# Altium PCB VanAtta_Switch_TB.PcbDoc (part 1 of 2)
Units mil, origin at the board's own origin, x right, y up, seen from the top; angles counter-clockwise.
Board outline 5090 x 7845 mil, 4 copper layers (Top Layer, Int (GND), Int (PWR), Bottom Layer), stack 53.912 mil thick; 128 components, 107 nets, 607 pads, 288 vias.
Unrouted connection lines stored in the file: 160.
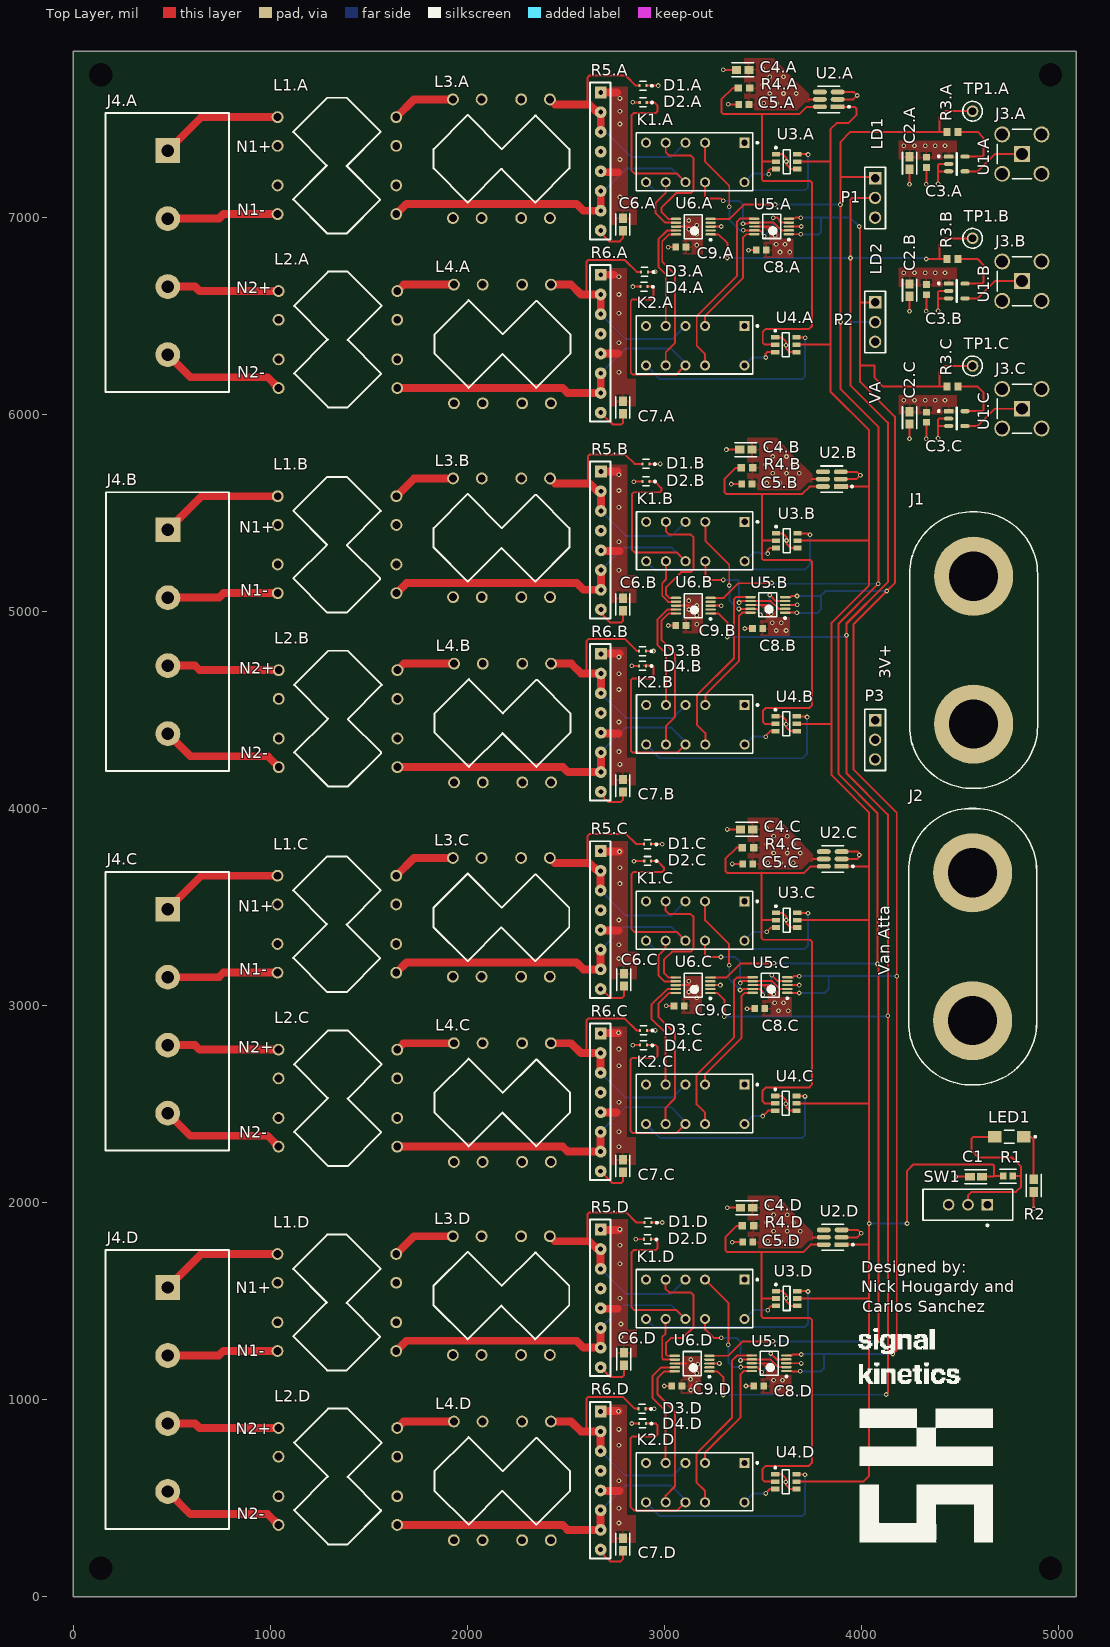
[diagram p0: Top Layer view]
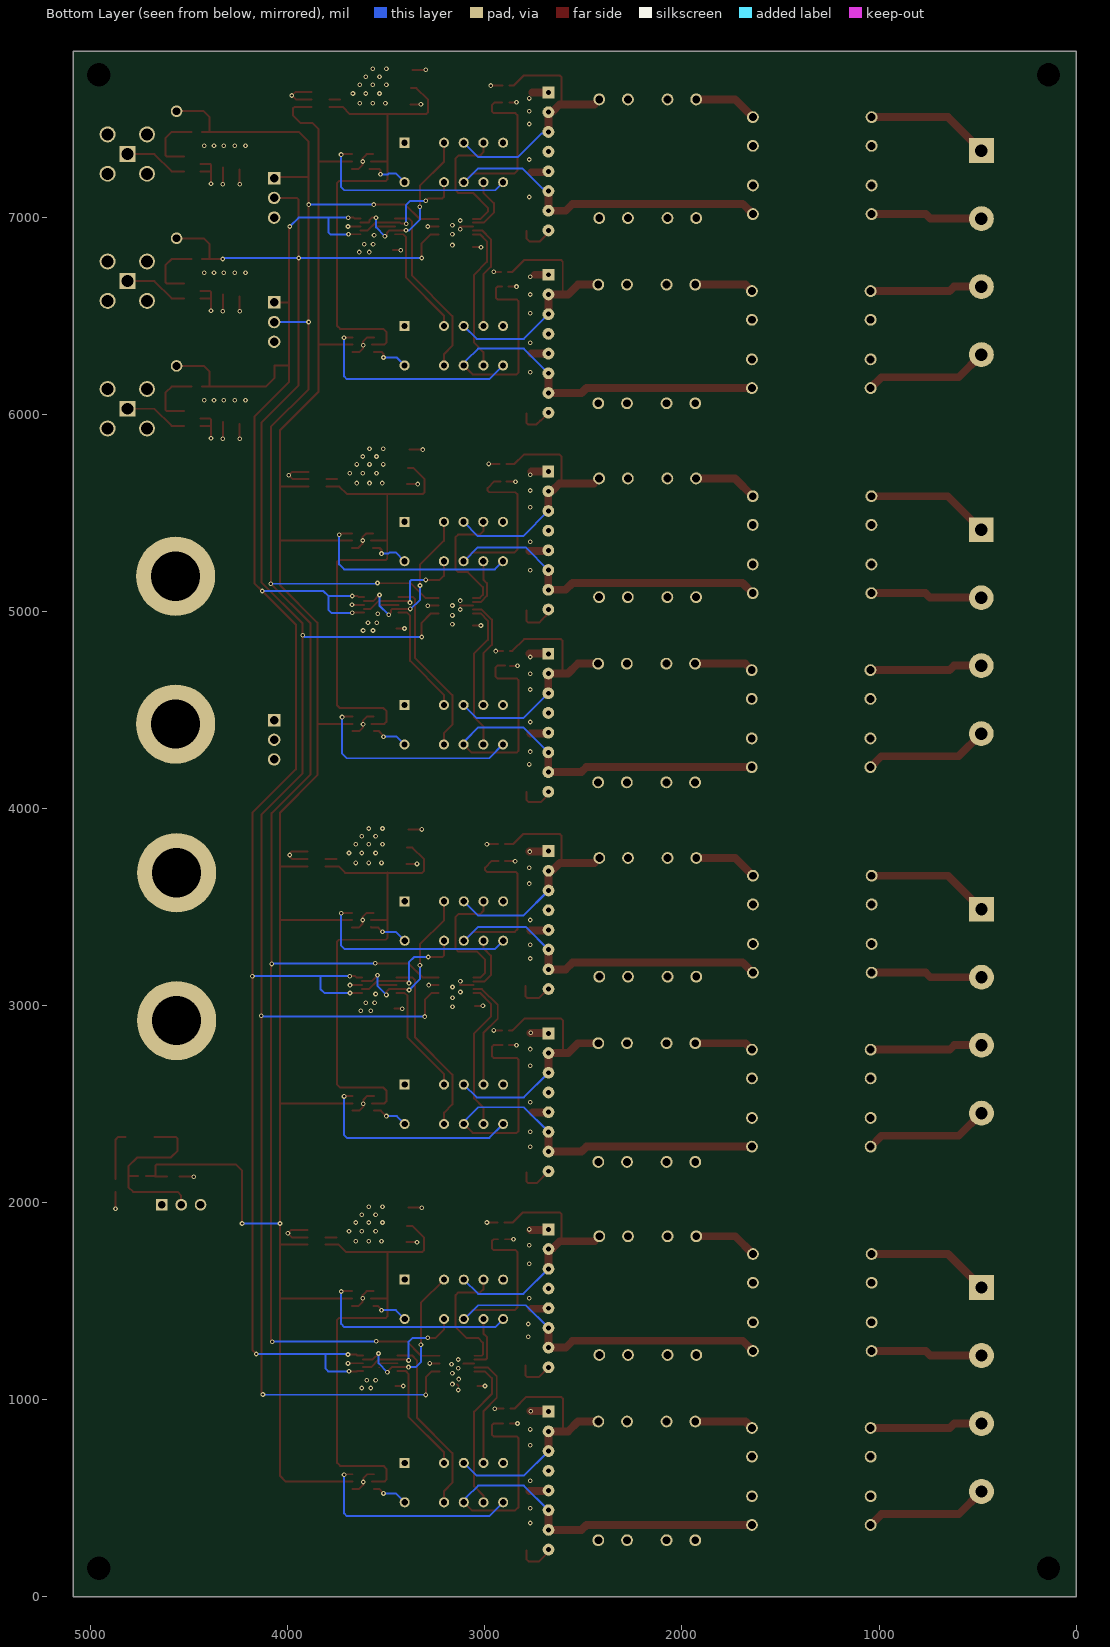
[diagram p1: Bottom Layer view, seen from below]
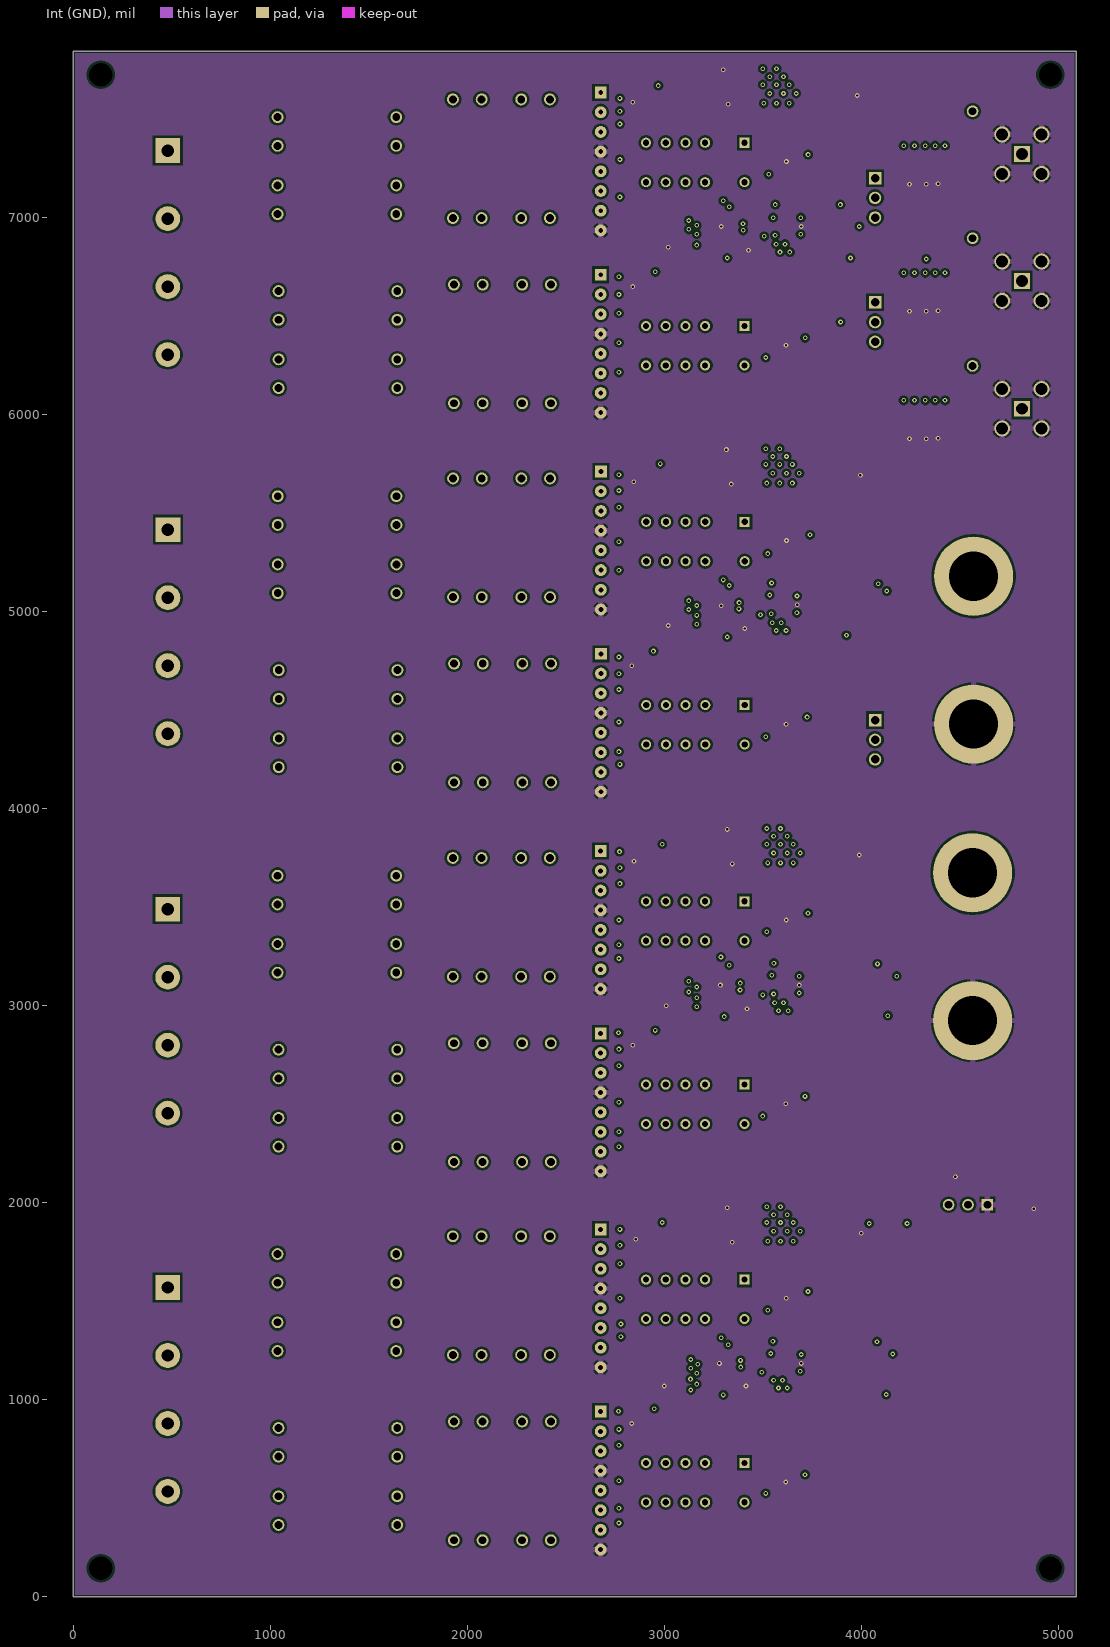
[diagram p2: Int (GND)]
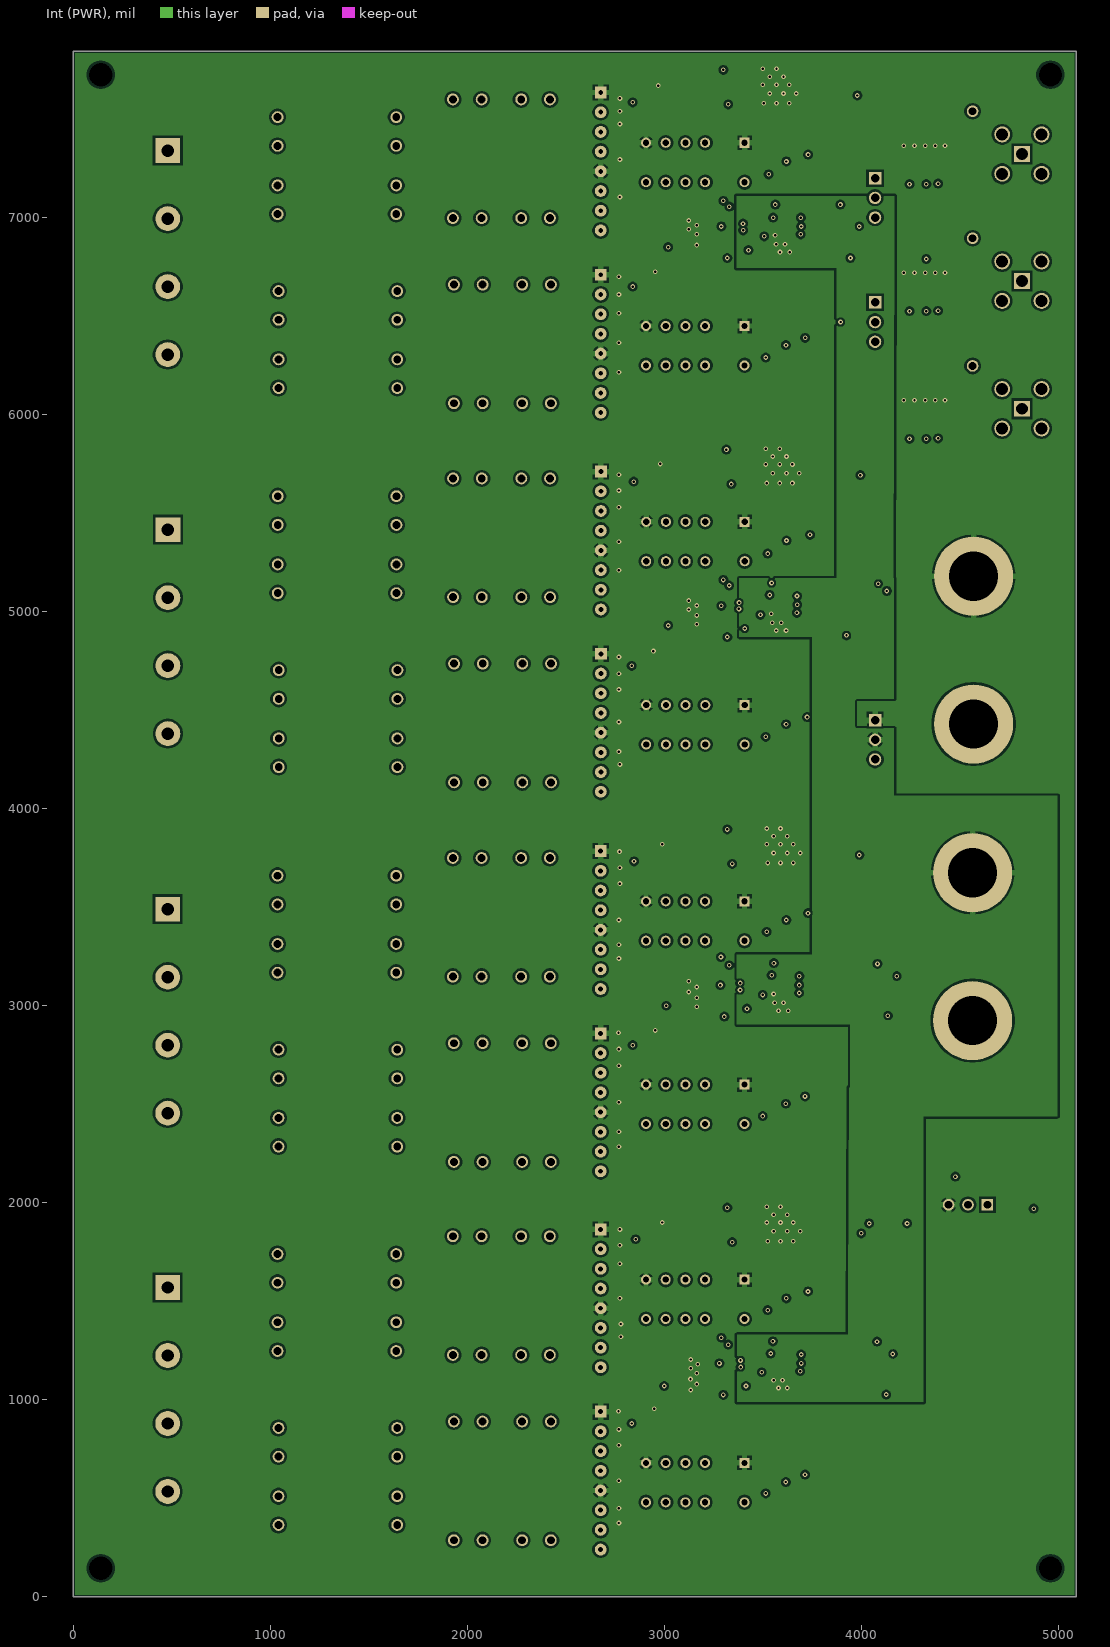
[diagram p3: Int (PWR)]
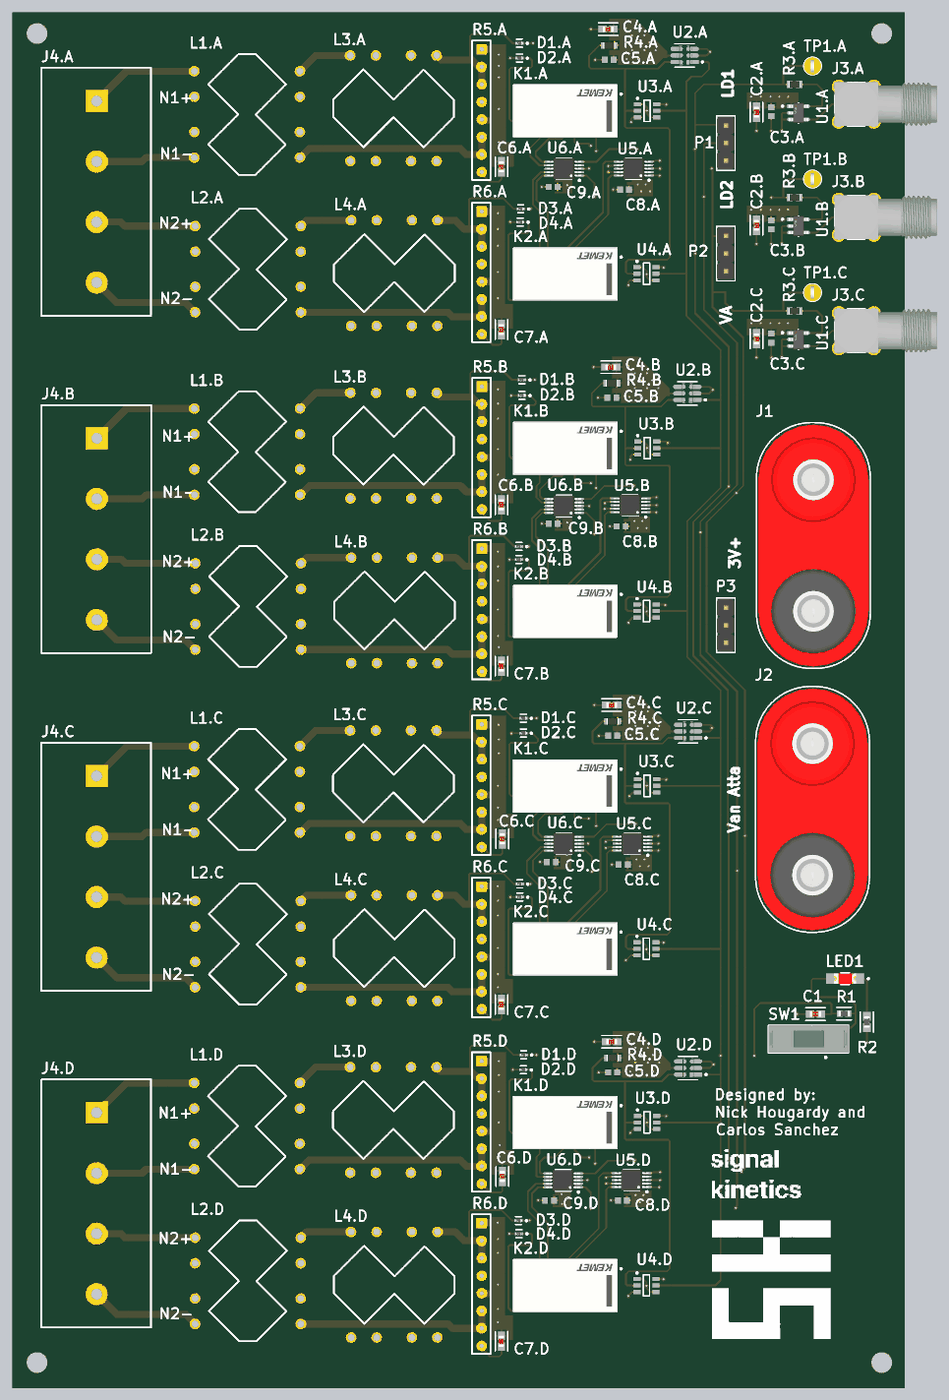
[diagram p5: 3D render of the assembled board from above, using the file's embedded part models]

## Layer stack, top to bottom
Top Solder: solder mask 1, SM-001, Dk 4
Top Layer: signal copper 1.378
Dielectric 1: prepreg 5.1, PP-017, Dk 4.3
Dielectric 2: prepreg 5.1, PP-017, Dk 4.3
Int (GND): signal copper 1.378
Dielectric 3: core 28, Core-039, Dk 4.8
Int (PWR): signal copper 1.378
Dielectric 4: prepreg 5.1, PP-017, Dk 4.3
Dielectric 5: prepreg 5.1, PP-017, Dk 4.3
Bottom Layer: signal copper 1.378
Bottom Solder: solder mask 1, SM-001, Dk 4

## Board outline
0,0 0,7845 5090,7845 5090,0

## Design rules (kind name [scope] priority, off if disabled: settings)
AcuteAngle [All] p1: minimum=6.00000000000000E+0001 checktracksonly=TRUE
AssemblyTestPointUsage [(not InNetClass('NOTESTPOINTS'))] p1: allowmultiple=TRUE
AssemblyTestPointUsage AssemblyTestPointUsageN [InNetClass('NOTESTPOINTS')] p2: valid=2 allowmultiple=TRUE
AssemblyTestpoint [All] p1: testpointundercomponent=TRUE minsize=31.5 maxsize=78.74 preferedsize=39.37 minholesize=0 maxholesize=13.78 preferedholesize=0 testpointgrid=50 usegrid=FALSE gridoriginx=3444.88 gridoriginy=2460.63 gridtolerance=0.01 allowsidetop=TRUE minspacing=100 // Zollner
BoardOutlineClearance BoardCopperOutlineClearance [All] p1: gap=10 ignorepadtopadclearanceinfootprint=FALSE
Clearance PadToViaClearance [IsVia and not IsComponentVia vs IsPad] p1: gap=9 ignorepadtopadclearanceinfootprint=FALSE
Clearance "Clearance (FAB)" [All] p2: gap=8 ignorepadtopadclearanceinfootprint=TRUE except(12: Arc-Poly Track-Poly SMDPad-Poly THPad-Poly Via-Poly Fill-Poly Poly-Poly)
ComponentClearance ComponentClearance_NetTie [((ObjectKind = 'Component') And (ComponentType = 'Net Tie')) Or (Footprint = 'StarPoint') Or (Footprint like 'NetTieVia*')] p1: gap=-150 collisioncheckmode=3 verticalgap=-150 showdistances=FALSE
ComponentClearance [All] p2: gap=10 collisioncheckmode=3 verticalgap=10 showdistances=FALSE
DiffPairsRouting [All] p1: maxlimit=50 minlimit=8 mostfreqgap=8 toplayer_minwidth=6 toplayer_maxwidth=100 toplayer_prefwidth=10 midlayer1_minwidth=6 midlayer1_maxwidth=100 midlayer1_prefwidth=10 midlayer2_minwidth=6 midlayer2_maxwidth=100 midlayer2_prefwidth=10 bottomlayer_minwidth=6 bottomlayer_maxwidth=100 bottomlayer_prefwidth=10 maxuncoupledlength=500
FabricationTestPointUsage [All] p1: valid=2 allowmultiple=FALSE
FabricationTestpoint [(IsVia)] p1: side=3 testpointundercomponent=TRUE minsize=40 maxsize=100 preferedsize=60 minholesize=0 maxholesize=40 preferedholesize=32 testpointgrid=1 allowsidetop=TRUE allowsidebottom=TRUE usegrid=FALSE gridtolerance=0.01
HoleSize [All] p1: absolutevalues=TRUE maxlimit=250 minlimit=11.81 maxpercent=80.000 minpercent=20.000 // Zollner
HoleToHoleClearance HoleToHoleClearance_NetTieVia [InPadClass('NetTieVias') vs InPadClass('NetTieVias')] p1: gap=0 allowstackedmicrovias=TRUE
HoleToHoleClearance [All] p2: gap=9.84 allowstackedmicrovias=TRUE // Zollner
MinimumAnnularRing [All] p1: minimumring=5.91 // PCBWAY
MinimumSolderMaskSliver [All] p1: minsoldermaskwidth=3.5 // Zollner
PlaneClearance PlaneClearance_1 [All] p1: clearance=20
PlaneConnect [All] p1: pad.planeconnectstyle=Relief pad.reliefexpansion=20 pad.reliefentries=4 pad.reliefconductorwidth=10 pad.reliefairgap=10 via.planeconnectstyle=Direct via.reliefexpansion=20 via.reliefentries=4 via.reliefconductorwidth=10 via.reliefairgap=10
PolygonConnect [All] p1: thpad.connectstyle=Relief thpad.reliefconductorwidth=30 thpad.reliefentries=4 thpad.polygonreliefangle="90 Angle" thpad.airgapwidth=10 smdpad.connectstyle=Relief smdpad.reliefconductorwidth=10 smdpad.reliefentries=4 smdpad.polygonreliefangle="90 Angle" smdpad.airgapwidth=10 via.connectstyle=Direct via.reliefconductorwidth=10 via.reliefentries=4 via.polygonreliefangle="90 Angle" via.airgapwidth=10
RoomDefinition "Linear Array1" [InComponentClass('Linear Array1')] p1: confinementstyle=ConfineIn formatcopy=TRUE lockcomponents=FALSE outline 2990.63,6794.37 3350.63,6794.37 3350.63,7095 2990.63,7095
RoomDefinition "Signal Processing3" [InComponentClass('Signal Processing3')] p2: confinementstyle=ConfineIn formatcopy=TRUE lockcomponents=FALSE outline 3295,3650 4045,3650 4045,3955 3295,3955
RoomDefinition "Van Atta Array4" [InComponentClass('Van Atta Array4')] p3: confinementstyle=ConfineIn formatcopy=TRUE lockcomponents=FALSE outline 3792.4,1325.63 3376.6,1325.63 3376.6,1026.26 3792.4,1026.26
RoomDefinition "Van Atta Array3" [InComponentClass('Van Atta Array3')] p4: confinementstyle=ConfineIn formatcopy=TRUE lockcomponents=FALSE outline 3797.4,3245 3381.6,3245 3381.6,2945.63 3797.4,2945.63
RoomDefinition "Van Atta Array2" [InComponentClass('Van Atta Array2')] p5: confinementstyle=ConfineIn formatcopy=TRUE lockcomponents=FALSE outline 3785.8,5174.37 3370,5174.37 3370,4875 3785.8,4875
RoomDefinition "Input and Relays2" [InComponentClass('Input and Relays2')] p6: confinementstyle=ConfineIn formatcopy=TRUE lockcomponents=FALSE outline 63.39,3988.82 3804.06,3988.82 3804.06,4863.82 2965.75,4863.82 2965.75,5179.01 3804.06,5175.67 3804.06,5556.18 3265.54,5556.18 3265.75,5883.82 63.39,5883.82
RoomDefinition "Input and Relays1" [InComponentClass('Input and Relays1')] p7: confinementstyle=ConfineIn formatcopy=TRUE lockcomponents=FALSE outline 62.64,5912.64 3803.31,5912.64 3803.31,6787.64 2965,6787.64 2965,7102.83 3803.31,7099.49 3803.31,7480 3264.79,7480 3265,7807.64 62.64,7807.64
RoomDefinition "Van Atta Array1" [InComponentClass('Van Atta Array1')] p8: confinementstyle=ConfineIn formatcopy=TRUE lockcomponents=FALSE outline 3805,7095 3389.2,7095 3389.2,6795.63 3805,6795.63
RoomDefinition "Top sheet" [InComponentClass('Top sheet')] p9: confinementstyle=ConfineIn formatcopy=TRUE lockcomponents=FALSE outline 4180,1860 4970,1860 4970,5665 4180,5665
RoomDefinition "Linear Data 1" [InComponentClass('Linear Data 1')] p10: confinementstyle=ConfineIn formatcopy=TRUE lockcomponents=FALSE outline 4185,7070 5340,7070 5340,7690 4185,7690
RoomDefinition "Signal Processing1" [InComponentClass('Signal Processing1')] p11: confinementstyle=ConfineIn formatcopy=TRUE lockcomponents=FALSE outline 3275,7505 4025,7505 4025,7810 3275,7810
RoomDefinition "Signal Processing2" [InComponentClass('Signal Processing2')] p12: confinementstyle=ConfineIn formatcopy=TRUE lockcomponents=FALSE outline 3290.61,5577.6 4040.61,5577.6 4040.61,5882.6 3290.61,5882.6
RoomDefinition "Linear Array2" [InComponentClass('Linear Array2')] p13: confinementstyle=ConfineIn formatcopy=TRUE lockcomponents=FALSE outline 2990.63,4870.63 3350.63,4870.63 3350.63,5171.26 2990.63,5171.26
RoomDefinition "Linear Data 2" [InComponentClass('Linear Data 2')] p14: confinementstyle=ConfineIn formatcopy=TRUE lockcomponents=FALSE outline 4185,6425 5345,6425 5345,7045 4185,7045
RoomDefinition "Van Atta Data" [InComponentClass('Van Atta Data')] p15: confinementstyle=ConfineIn formatcopy=TRUE lockcomponents=FALSE outline 4185,5777.56 5350,5777.56 5350,6397.56 4185,6397.56
RoomDefinition "Linear Array3" [InComponentClass('Linear Array3')] p16: confinementstyle=ConfineIn formatcopy=TRUE lockcomponents=FALSE outline 2990,2944.37 3350,2944.37 3350,3245 2990,3245
RoomDefinition "Linear Array4" [InComponentClass('Linear Array4')] p17: confinementstyle=ConfineIn formatcopy=TRUE lockcomponents=FALSE outline 2985,1024.37 3345,1024.37 3345,1325 2985,1325
RoomDefinition "Input and Relays4" [InComponentClass('Input and Relays4')] p18: confinementstyle=ConfineIn formatcopy=TRUE lockcomponents=FALSE outline 62.36,142.64 3803.03,142.64 3803.03,1017.64 2964.72,1017.64 2964.72,1332.83 3803.03,1329.49 3803.03,1710 3264.51,1710 3264.72,2037.64 62.36,2037.64
RoomDefinition "Signal Processing4" [InComponentClass('Signal Processing4')] p19: confinementstyle=ConfineIn formatcopy=TRUE lockcomponents=FALSE outline 3295,1730 4045,1730 4045,2035 3295,2035
RoomDefinition "Input and Relays3" [InComponentClass('Input and Relays3')] p20: confinementstyle=ConfineIn formatcopy=TRUE lockcomponents=FALSE outline 62.36,2062.64 3803.03,2062.64 3803.03,2937.64 2964.72,2937.64 2964.72,3252.83 3803.03,3249.49 3803.03,3630 3264.51,3630 3264.72,3957.64 62.36,3957.64
RoutingVias [All] p1: holewidth=12 width=24 viastyle="Through Hole" minholewidth=12 minwidth=24 maxholewidth=12 maxwidth=24
SMDEntry [not IsTestpoint] p1: side=TRUE corner=TRUE anyangle=FALSE
SMDNeckDown [not IsTestpoint] p1: percent=90.000
SMDToCorner [All] p1: distance=10000
SMDToPlane [All] p1: distance=0
ShortCircuit [All vs not IsBoardCutoutRegion] p1: allowed=FALSE
SilkToSolderMaskClearance [IsPad] p1: minsilkscreentomaskgap=5 clearancetoexposedcopper=TRUE
SolderMaskExpansion [All] p1: expansion=1.97 istentingtop=FALSE // Zollner
SolderMaskExpansion SolderMaskExpansionToHoles [All] p2: expansion=3.94 istentingtop=FALSE soldermaskfromhole=TRUE // Zollner
UnRoutedNet [All] p1: checkbadconnections=TRUE
Width [All] p1: maxlimit=500 minlimit=4 preferedwidth=10
16 further rules are at their usual default settings.

## Classes and differential pairs
channel class USRP: "Linear Data 1" "Linear Data 2" "Van Atta Data"
channel class "Van Atta array": "Van Atta Array1" "Van Atta Array2" "Van Atta Array3" "Van Atta Array4"
channel class V2LinearArray: "Linear Array1" "Linear Array2" "Linear Array3" "Linear Array4"
channel class Switch: "Switch 1" "Switch 2" "Switch 3" "Switch 4"
channel class "Signal Processing": "Signal Processing1" "Signal Processing2" "Signal Processing3" "Signal Processing4"
channel class "Inputs and Relays": "Input and Relays1" "Input and Relays2" "Input and Relays3" "Input and Relays4"
component class "Van Atta Array3": C8.C U5.C
component class "Van Atta Array2": C8.B U5.B
component class "Van Atta Array1": C8.A U5.A
component class "Van Atta Array4": C8.D U5.D
component class "Top sheet": C1 J1 J2 LED1 P1 P2 P3 R1 R2 SW1
component class "Signal Processing3": C4.C C5.C "R1.Signal Processing4" R4.C U2.C
component class "Signal Processing2": C4.B C5.B "R1.Signal Processing3" R4.B U2.B
component class "Signal Processing1": C4.A C5.A "R1.Signal Processing2" R4.A U2.A
component class "Signal Processing4": C4.D C5.D "R1.Signal Processing1" R4.D U2.D
component class "Linear Array3": C9.C U6.C
component class "Linear Array2": C9.B U6.B
component class "Linear Array1": C9.A U6.A
component class "Linear Array4": C9.D U6.D
component class "Input and Relays3": C6.C C7.C D1.C D2.C D3.C D4.C J4.C K1.C K2.C L1.C L2.C L3.C L4.C R5.C R6.C U3.C U4.C
component class "Input and Relays2": C6.B C7.B D1.B D2.B D3.B D4.B J4.B K1.B K2.B L1.B L2.B L3.B L4.B R5.B R6.B U3.B U4.B
component class "Input and Relays1": C6.A C7.A D1.A D2.A D3.A D4.A J4.A K1.A K2.A L1.A L2.A L3.A L4.A R5.A R6.A U3.A U4.A
component class "Input and Relays4": C6.D C7.D D1.D D2.D D3.D D4.D J4.D K1.D K2.D L1.D L2.D L3.D L4.D R5.D R6.D U3.D U4.D

## Components (designator, comment, footprint, x,y, rotation, side; value= is the part's Value field where it differs from the comment)
C1 "UMK107BJ105KA-T" FP-0603-L_1_6_0_1-W_0_8_0-IPC_A 4581.9,2132.5 r180 top
C2.A "GRM188R60J106ME47D" FP-GRM188-0_1-e0_2_0_55-IPC_A 4245,7276.57 r270 top
C2.B "GRM188R60J106ME47D" FP-GRM188-0_1-e0_2_0_55-IPC_A 4245,6631.57 r270 top
C2.C "GRM188R60J106ME47D" FP-GRM188-0_1-e0_2_0_55-IPC_A 4245,5984.13 r270 top
C3.A "06035C104KAT4A" CAPC1608X90X35LL15T15 4330,7280 r90 top
C3.B "06035C104KAT4A" CAPC1608X90X35LL15T15 4330,6635 r90 top
C3.C "06035C104KAT4A" CAPC1608X90X35LL15T15 4330,5987.56 r90 top
C4.A "GRM188R60J106ME47D" FP-GRM188-0_1-e0_2_0_55-IPC_A 3398.43,7750 r180 top (schematic designator C4)
C4.B "GRM188R60J106ME47D" FP-GRM188-0_1-e0_2_0_55-IPC_A 3414.04,5822.6 r180 top (schematic designator C4)
C4.C "GRM188R60J106ME47D" FP-GRM188-0_1-e0_2_0_55-IPC_A 3418.43,3895 r180 top (schematic designator C4)
C4.D "GRM188R60J106ME47D" FP-GRM188-0_1-e0_2_0_55-IPC_A 3418.43,1975 r180 top (schematic designator C4)
C5.A "06035C104KAT4A" CAPC1608X90X35LL15T15 3404.41,7575 r0 top (schematic designator C5)
C5.B "06035C104KAT4A" CAPC1608X90X35LL15T15 3420.02,5647.6 r0 top (schematic designator C5)
C5.C "06035C104KAT4A" CAPC1608X90X35LL15T15 3424.41,3720 r0 top (schematic designator C5)
C5.D "06035C104KAT4A" CAPC1608X90X35LL15T15 3424.41,1800 r0 top (schematic designator C5)
C6.A "GRM188R60J106ME47D" FP-GRM188-0_1-e0_2_0_55-IPC_A 2790,6965 r270 top (schematic designator C6)
C6.B "GRM188R60J106ME47D" FP-GRM188-0_1-e0_2_0_55-IPC_A 2790,5036.57 r270 top (schematic designator C6)
C6.C "GRM188R60J106ME47D" FP-GRM188-0_1-e0_2_0_55-IPC_A 2795,3131.57 r270 top (schematic designator C6)
C6.D "GRM188R60J106ME47D" FP-GRM188-0_1-e0_2_0_55-IPC_A 2795,1206.57 r270 top (schematic designator C6)
C7.A "GRM188R60J106ME47D" FP-GRM188-0_1-e0_2_0_55-IPC_A 2790,6036.57 r270 top (schematic designator C7)
C7.B "GRM188R60J106ME47D" FP-GRM188-0_1-e0_2_0_55-IPC_A 2790,4116.57 r270 top (schematic designator C7)
C7.C "GRM188R60J106ME47D" FP-GRM188-0_1-e0_2_0_55-IPC_A 2790,2186.57 r270 top (schematic designator C7)
C7.D "GRM188R60J106ME47D" FP-GRM188-0_1-e0_2_0_55-IPC_A 2790,266.57 r270 top (schematic designator C7)
C8.A "06035C104KAT4A" CAPC1608X90X35LL15T15 3492.6,6835 r180 top (schematic designator C8)
C8.B "06035C104KAT4A" CAPC1608X90X35LL15T15 3473.4,4914.37 r180 top (schematic designator C8)
C8.C "06035C104KAT4A" CAPC1608X90X35LL15T15 3485,2985 r180 top (schematic designator C8)
C8.D "06035C104KAT4A" CAPC1608X90X35LL15T15 3480,1070 r180 top (schematic designator C8)
C9.A "06035C104KAT4A" CAPC1608X90X35LL15T15 3085,6850 r180 top (schematic designator C9)
C9.B "06035C104KAT4A" CAPC1608X90X35LL15T15 3085,4930 r180 top (schematic designator C9)
C9.C "06035C104KAT4A" CAPC1608X90X35LL15T15 3075,3000 r180 top (schematic designator C9)
C9.D "06035C104KAT4A" CAPC1608X90X35LL15T15 3064.37,1070 r180 top (schematic designator C9)
D1.A "NSR0140P2T5G" FP-514AB-01-MFG 2892.28,7670 r180 top value=2pF (schematic designator D1)
D1.B "NSR0140P2T5G" FP-514AB-01-MFG 2907.28,5750 r180 top value=2pF (schematic designator D1)
D1.C "NSR0140P2T5G" FP-514AB-01-MFG 2915,3820 r180 top value=2pF (schematic designator D1)
D1.D "NSR0140P2T5G" FP-514AB-01-MFG 2917.28,1900 r180 top value=2pF (schematic designator D1)
D2.A "NSR0140P2T5G" FP-514AB-01-MFG 2892.72,7585 r180 top value=2pF (schematic designator D2)
D2.B "NSR0140P2T5G" FP-514AB-01-MFG 2907.71,5661.18 r180 top value=2pF (schematic designator D2)
D2.C "NSR0140P2T5G" FP-514AB-01-MFG 2915.55,3735 r180 top value=2pF (schematic designator D2)
D2.D "NSR0140P2T5G" FP-514AB-01-MFG 2915,1815 r180 top value=2pF (schematic designator D2)
D3.A "NSR0140P2T5G" FP-514AB-01-MFG 2900,6725 r180 top value=2pF (schematic designator D3)
D3.B "NSR0140P2T5G" FP-514AB-01-MFG 2890,4800 r180 top value=2pF (schematic designator D3)
D3.C "NSR0140P2T5G" FP-514AB-01-MFG 2895,2875 r180 top value=2pF (schematic designator D3)
D3.D "NSR0140P2T5G" FP-514AB-01-MFG 2887.28,955 r180 top value=2pF (schematic designator D3)
D4.A "NSR0140P2T5G" FP-514AB-01-MFG 2896.97,6650 r180 top value=2pF (schematic designator D4)
D4.B "NSR0140P2T5G" FP-514AB-01-MFG 2890,4725 r180 top value=2pF (schematic designator D4)
D4.C "NSR0140P2T5G" FP-514AB-01-MFG 2894.72,2800 r180 top value=2pF (schematic designator D4)
D4.D "NSR0140P2T5G" FP-514AB-01-MFG 2890,880 r180 top value=2pF (schematic designator D4)
J1 "2269-2" FP-2269-2-MFG 4570,4805 r270 top
J2 "2269-2" FP-2269-2-MFG 4565,3300 r270 top
J3.A "731000114" MOLX-731000114_V 4815,7322.44 r180 top
J3.B "731000114" MOLX-731000114_V 4815,6677.44 r180 top
J3.C "731000114" MOLX-731000114_V 4815,6030 r180 top
J4.A "NC6-P108-04" NC6-P108-04-Footprint-1 480.28,7340 r0 top (schematic designator J4)
J4.B "NC6-P108-04" NC6-P108-04-Footprint-1 481.02,5416.18 r0 top (schematic designator J4)
J4.C "NC6-P108-04" NC6-P108-04-Footprint-1 480,3490 r0 top (schematic designator J4)
J4.D "NC6-P108-04" NC6-P108-04-Footprint-1 480,1570 r0 top (schematic designator J4)
K1.A "EC2-3TNU" FP-EC2-3TNU-MFG 3153.7,7283.94 r180 top (schematic designator K1)
K1.B "EC2-3TNU" FP-EC2-3TNU-MFG 3154.45,5360.12 r180 top (schematic designator K1)
K1.C "EC2-3TNU" FP-EC2-3TNU-MFG 3153.43,3433.94 r180 top (schematic designator K1)
K1.D "EC2-3TNU" FP-EC2-3TNU-MFG 3153.43,1513.94 r180 top (schematic designator K1)
K2.A "EC2-3TNU" FP-EC2-3TNU-MFG 3153.7,6353.94 r180 top (schematic designator K2)
K2.B "EC2-3TNU" FP-EC2-3TNU-MFG 3154.45,4430.12 r180 top (schematic designator K2)
K2.C "EC2-3TNU" FP-EC2-3TNU-MFG 3153.43,2503.94 r180 top (schematic designator K2)
K2.D "EC2-3TNU" FP-EC2-3TNU-MFG 3153.43,583.94 r180 top (schematic designator K2)
L1.A "RM6 Inductor" "RM6 Inductor-Footprint-1" 1037.64,7510 r0 top (schematic designator L1)
L1.B "RM6 Inductor" "RM6 Inductor-Footprint-1" 1038.39,5586.18 r0 top (schematic designator L1)
L1.C "RM6 Inductor" "RM6 Inductor-Footprint-1" 1037.36,3660 r0 top (schematic designator L1)
L1.D "RM6 Inductor" "RM6 Inductor-Footprint-1" 1037.36,1740 r0 top (schematic designator L1)
L2.A "RM6 Inductor" "RM6 Inductor-Footprint-1" 1042.64,6627.13 r0 top (schematic designator L2)
L2.B "RM6 Inductor" "RM6 Inductor-Footprint-1" 1043.39,4703.31 r0 top (schematic designator L2)
L2.C "RM6 Inductor" "RM6 Inductor-Footprint-1" 1042.36,2777.13 r0 top (schematic designator L2)
L2.D "RM6 Inductor" "RM6 Inductor-Footprint-1" 1042.36,857.13 r0 top (schematic designator L2)
L3.A "RM6 Inductor" "RM6 Inductor-Footprint-1" 1927.64,6997.64 r90 top (schematic designator L3)
L3.B "RM6 Inductor" "RM6 Inductor-Footprint-1" 1928.39,5073.82 r90 top (schematic designator L3)
L3.C "RM6 Inductor" "RM6 Inductor-Footprint-1" 1927.36,3147.64 r90 top (schematic designator L3)
L3.D "RM6 Inductor" "RM6 Inductor-Footprint-1" 1927.36,1227.64 r90 top (schematic designator L3)
L4.A "RM6 Inductor" "RM6 Inductor-Footprint-1" 1932.64,6057.64 r90 top (schematic designator L4)
L4.B "RM6 Inductor" "RM6 Inductor-Footprint-1" 1933.39,4133.82 r90 top (schematic designator L4)
L4.C "RM6 Inductor" "RM6 Inductor-Footprint-1" 1932.36,2207.64 r90 top (schematic designator L4)
L4.D "RM6 Inductor" "RM6 Inductor-Footprint-1" 1932.36,287.64 r90 top (schematic designator L4)
LED1 "CMD15-21VRD/TR8" FP-CMD15-21-MFG 4751.18,2335 r180 top
P1 "61300311121" 61300311121 4070,7100 r270 top
P2 "61300311121" 61300311121 4070,6470 r270 top
P3 "61300311121" 61300311121 4070,4350 r270 top
R1 "ERA-3AEB102V" FP-ERA3A-IPC_C 4745,2135 r180 top
R2 "ERA-3AEB471V" FP-ERA3A-IPC_A 4875,2087.49 r270 top
R3.A "Resistor 22R +/-1% 0603 100 mW" RESC1609X50X30ML08T20 4462.44,7435 r180 top value=22
R3.B "Resistor 22R +/-1% 0603 100 mW" RESC1609X50X30ML08T20 4462.44,6790 r180 top value=22
R3.C "Resistor 22R +/-1% 0603 100 mW" RESC1609X50X30ML08T20 4462.44,6142.56 r180 top value=22
R4.A "ERJ-3EKF4701V" RESC1608X55X30NL15T15 3404.92,7657.74 r0 top (schematic designator R4)
R4.B "ERJ-3EKF4701V" RESC1608X55X30NL15T15 3420.54,5730.33 r0 top (schematic designator R4)
R4.C "ERJ-3EKF4701V" RESC1608X55X30NL15T15 3424.92,3802.74 r0 top (schematic designator R4)
R4.D "ERJ-3EKF4701V" RESC1608X55X30NL15T15 3424.92,1882.74 r0 top (schematic designator R4)
R5.A "4608X-102-205FLF" 4608X-102-205FLF-Footprint-1 2677.64,7635 r270 top (schematic designator R5)
R5.B "4608X-102-205FLF" 4608X-102-205FLF-Footprint-1 2678.39,5711.18 r270 top (schematic designator R5)
R5.C "4608X-102-205FLF" 4608X-102-205FLF-Footprint-1 2677.36,3785 r270 top (schematic designator R5)
R5.D "4608X-102-205FLF" 4608X-102-205FLF-Footprint-1 2677.36,1865 r270 top (schematic designator R5)
R6.A "4608X-102-205FLF" 4608X-102-205FLF-Footprint-1 2677.64,6710 r270 top (schematic designator R6)
R6.B "4608X-102-205FLF" 4608X-102-205FLF-Footprint-1 2678.39,4786.18 r270 top (schematic designator R6)
R6.C "4608X-102-205FLF" 4608X-102-205FLF-Footprint-1 2677.36,2860 r270 top (schematic designator R6)
R6.D "4608X-102-205FLF" 4608X-102-205FLF-Footprint-1 2677.36,940 r270 top (schematic designator R6)
SW1 "EG1218" ESWI-EG1218_V 4541.57,1990 r180 top
TP1.A "5003" KSTN-5003 4565,7540 r90 top
TP1.B "5003" KSTN-5003 4565,6895 r90 top
TP1.C "5003" KSTN-5003 4565,6247.56 r90 top
U1.A "TLV4041R5DBVR" FP-DBV0005A-IPC_C 4485,7272.44 r0 top
U1.B "TLV4041R5DBVR" FP-DBV0005A-IPC_C 4485,6627.44 r0 top
U1.C "TLV4041R5DBVR" FP-DBV0005A-IPC_C 4485,5980 r0 top
U2.A "SN74LVC2G06DBVR" FP-DBV0006A-IPC_A 3835,7600 r180 top (schematic designator U2)
U2.B "SN74LVC2G06DBVR" FP-DBV0006A-IPC_A 3850.61,5672.6 r180 top (schematic designator U2)
U2.C "SN74LVC2G06DBVR" FP-DBV0006A-IPC_A 3855,3745 r180 top (schematic designator U2)
U2.D "SN74LVC2G06DBVR" FP-DBV0006A-IPC_A 3855,1825 r180 top (schematic designator U2)
U3.A "DMN2004DMK-7" SOT95P285X130-6N 3620.94,7284.41 r0 top (schematic designator U3)
U3.B "DMN2004DMK-7" SOT95P285X130-6N 3621.69,5360.59 r0 top (schematic designator U3)
U3.C "DMN2004DMK-7" SOT95P285X130-6N 3620.67,3434.41 r0 top (schematic designator U3)
U3.D "DMN2004DMK-7" SOT95P285X130-6N 3620.67,1514.41 r0 top (schematic designator U3)
U4.A "DMN2004DMK-7" SOT95P285X130-6N 3617.64,6355 r0 top (schematic designator U4)
U4.B "DMN2004DMK-7" SOT95P285X130-6N 3618.39,4431.18 r0 top (schematic designator U4)
U4.C "DMN2004DMK-7" SOT95P285X130-6N 3617.36,2505 r0 top (schematic designator U4)
U4.D "DMN2004DMK-7" SOT95P285X130-6N 3617.36,585 r0 top (schematic designator U4)
U5.A "TS5A23160DGST" TSSOP50P490X110-10N 3545,6955 r180 top (schematic designator U5)
U5.B "TS5A23160DGST" TSSOP50P490X110-10N 3525.8,5034.37 r180 top (schematic designator U5)
U5.C "TS5A23160DGST" TSSOP50P490X110-10N 3537.4,3105 r180 top (schematic designator U5)
U5.D "TS5A23160DGST" TSSOP50P490X110-10N 3532.4,1185.63 r180 top (schematic designator U5)
U6.A "TS5A23160DGST" TSSOP50P490X110-10N 3147.4,6954.37 r180 top (schematic designator U6)
U6.B "TS5A23160DGST" TSSOP50P490X110-10N 3147.4,5030.63 r180 top (schematic designator U6)
U6.C "TS5A23160DGST" TSSOP50P490X110-10N 3146.77,3104.37 r180 top (schematic designator U6)
U6.D "TS5A23160DGST" TSSOP50P490X110-10N 3141.77,1184.37 r180 top (schematic designator U6)

## Footprints (in the part's own frame and the unit in brackets; to place one, negate y for a bottom-side part, rotate by r counter-clockwise, add the part's x,y. Pads: shape width x height; smd on the part's side, far side on the other; paste and mask are expansions set on the pad)
4608X-102-205FLF-Footprint-1 [mil]
  rect 60x60 hole 25: 1(0,0)
  round 60 hole 25: 2(100,0) 3(200,0) 4(300,0) 5(400,0) 6(500,0) 7(600,0) 8(700,0)
  silkscreen extent -50,-55 745,50
61300311121 [mm] "Pin Header, pitch 2.54 mm, THT, Vertical, single row, 3p"
  rect 1.6x1.6 hole 1.1: 1(-2.54,0)
  round 1.6 hole 1.1: 2(0,0) 3(2.54,0)
  silkscreen extent -3.96,-1.35 3.96,1.35, body extent -3.81,-1.27 3.81,1.27, height 8.57
CAPC1608X90X35LL15T15 [mm] "Chip Capacitor, 2-Leads, Body 1.60x0.81mm, IPC High Density"
  rect 0.85x0.9 smd: 1(-0.65,0) 2(0.65,0)
  body extent -0.88,-0.48 0.87,0.48, height 0.9
ESWI-EG1218_V [mm] "THD, 3-Leads, Body 11.6x4mm, Pitch 2.5mm"
  rect 1.5x1.5 hole 1: 1(-2.5,0)
  round 1.5 hole 1: 2(0,0) 3(2.5,0)
  silkscreen extent -5.8,-2 5.8,2.77, body extent -5.8,-2 5.8,2, height 7.4
FP-514AB-01-MFG [mm]
  rect 0.3x0.4 smd paste+0 mask+0: 1(-0.45,0) 2(0.45,0)
  silkscreen extent -1.28,-0.58 0.43,0.58, body extent -0.7,-0.43 0.7,0.43, height 0.25
FP-0603-L_1_6_0_1-W_0_8_0-IPC_A [mil]
  rect 49.52x39.85 smd paste+0 mask+0: 1(-30.6,0) 2(30.6,0)
  silkscreen extent -55,-36 55,36, body extent -75,-40 75,40, height 10
FP-2269-2-MFG [mil]
  round 401.83 hole 250 paste-39370.1 mask+0: 1(-375,0) 2(375,0)
  silkscreen extent -701,-325 701,325, body extent -704,-329 704,329, height 10
FP-CMD15-21-MFG [mm]
  rect 1.75x1.5 smd paste+0 mask+0: 1(-1.875,0) 2(1.875,0)
  silkscreen extent -3.48,-0.85 0.63,0.85, body extent -2.85,-0.95 2.85,0.95, height 0.25
FP-DBV0005A-IPC_C [mm]
  rect 1.205x0.532 smd paste+0 mask+0: 1(-1.05,0.95)
  rrect100% 1.205x0.532 smd paste+0 mask+0: 2(-1.05,0) 3(-1.05,-0.95) 4(1.05,-0.95) 5(1.05,0.95)
  silkscreen extent -2.45,-1.45 0.05,1.45, body extent -1.75,-1.55 1.75,1.55, height 0.25
FP-DBV0006A-IPC_A [mm]
  rect 1.805x0.61 smd paste+0 mask+0: 1(-1.15,0.95)
  rrect100% 1.805x0.61 smd paste+0 mask+0: 2(-1.15,0) 3(-1.15,-0.95) 4(1.15,-0.95) 5(1.15,0) 6(1.15,0.95)
  silkscreen extent -2.73,-1.7 1.4,1.7, body extent -2.55,-1.95 2.55,1.95, height 0.25
FP-EC2-3TNU-MFG [mm]
  rect 1.3x1.3 hole 0.8 paste-1000 mask+0: 1(-6.45,-2.44)
  round 1.3 hole 0.8 paste-1000 mask+0: 3(-1.37,-2.44) 4(1.17,-2.44) 5(3.71,-2.44) 6(6.25,-2.44) 7(6.25,2.64) 8(3.71,2.64) 9(1.17,2.64) 10(-1.37,2.64) 12(-6.45,2.64)
  silkscreen extent -8.23,-3.75 7.5,3.75, body extent -7.6,-3.85 7.6,3.85, height 0.25
FP-ERA3A-IPC_A [mil]
  rect 49.41x43.55 smd paste+0 mask+0: 1(-32.51,0) 2(32.51,0)
  silkscreen extent -57,-38 57,38, body extent -77,-41 77,41, height 10
FP-ERA3A-IPC_C [mil]
  rect 33.66x35.68 smd paste+0 mask+0: 1(-24.63,0) 2(24.63,0)
  silkscreen extent -41,-35 41,35, body extent -45,-24 45,24, height 10
FP-GRM188-0_1-e0_2_0_55-IPC_A [mil]
  rect 47.57x39.85 smd paste+0 mask+0: 1(-31.57,0) 2(31.57,0)
  silkscreen extent -55,-36 55,36, body extent -75,-40 75,40, height 10
KSTN-5003 [mm] "Test Point, Through Hole, Dia 2.54mm"
  round 1.5 hole 1: 1(0,0)
  silkscreen extent -1.27,-1.27 1.27,1.27, body extent -1.27,-1.27 1.27,1.27, height 4.57
MOLX-731000114_V [mm] "Connector, 5-Leads, Body 14.8x6.35mm, Pitch 2.54mm"
  rect 2.05x2.05 hole 1.54: 1(0,0)
  round 2.05 hole 1.54: 2(-2.54,2.54) 3(-2.54,-2.54) 4(2.54,-2.54) 5(2.54,2.54)
  silkscreen extent -1.26,-3.17 3.17,3.17, body extent -11.62,-3.17 3.18,3.18, height 9.57
NC6-P108-04-Footprint-1 [mm]
  rect 3.2x3.2 hole 1.6: 1(0,0)
  round 3.2 hole 1.6: 2(0,-8.763) 3(0,-17.526) 4(0,-26.289)
  silkscreen extent -8,-31.11 7.87,4.83
RESC1608X55X30NL15T15 [mm] "Chip Resistor, 2-Leads, Body 1.75x0.95mm, IPC Medium Density"
  rect 0.95x0.95 smd: 1(-0.75,0) 2(0.75,0)
  body extent -0.87,-0.48 0.87,0.48, height 0.55
RESC1609X50X30ML08T20 [mm] "Chip Resistor, 2-Leads, Body 1.65x0.95mm, IPC Low Density"
  rect 0.9x1.05 smd: 1(-0.7,0) 2(0.7,0)
  body extent -0.82,-0.48 0.82,0.48, height 0.5
"RM6 Inductor-Footprint-1" [mil]
  round 60 hole 40: 1(0,0) 2(0,-145.67) 3(0,-346.46) 4(0,-492.13) 5(602.36,-492.13) 6(602.36,-346.46) 7(602.36,-145.67) 8(602.36,0)
  silkscreen extent 79,-591 524,98
SOT95P285X130-6N [mm] "SOT23, 6-Leads, Body 3.00x2.85mm, Pitch 0.95mm, IPC Medium Density"
  rect 1.05x0.6 smd: 1(-1.375,0.95) 2(-1.375,0) 3(-1.375,-0.95) 4(1.375,-0.95) 5(1.375,0) 6(1.375,0.95)
  silkscreen extent -1.5,-1.55 0.45,1.92, body extent -0.85,-1.55 0.85,1.55, height 1.3
TSSOP50P490X110-10N [mm] "TSSOP, 10-Leads, Body 3.00x3.00mm, Pitch 0.50mm, IPC Medium Density"
  oval 1.35x0.3 smd: 1(-2.225,1) 2(-2.225,0.5) 3(-2.225,0) 4(-2.225,-0.5) 5(-2.225,-1) 6(2.225,-1) 7(2.225,-0.5) 8(2.225,0) 9(2.225,0.5) 10(2.225,1)
  silkscreen extent -2.35,-1.55 1.15,1.82, body extent -2.45,-1.55 2.45,1.55, height 1.1

## Part data
C1: library part CMP-2000-05447-3, "None", Capacitance=1uF, Case Code (Imperial)=0603, Case Code (Metric)=1608, Dielectric=X5R, Max Operating Temperature=85°C, Min Operating Temperature=-55°C, Package Quantity=1, Tolerance=10%, Voltage Rating=50V, Case/Package=0603, Construction=Flat, Contact Plating=Nickel, Depth=0.8mm, Halogen Free="Halogen Free", Height=0.8mm, Length=1.6mm, Mount="Surface Mount", Number of Pins=2, Packaging="Tape and Reel", Radiation Hardening=No, RoHS Compliant=Yes, Series=M, Termination=SMD/SMT, Thickness=0.035inch, Voltage Rating (DC)=50V, Width=0.031inch
C2.A C2.B C2.C C4.A C4.B C4.C C4.D C6.A C6.B C6.C C6.D C7.A C7.B C7.C C7.D: library part CMP-2006-02792-2, "Chip Multilayer Ceramic Capacitors for General Purpose, 0603, 10uF, X5R, 15%, 20%, 6.3V", Capacitance=10uF, Case Code (Imperial)=0603, Case Code (Metric)=1608, Dielectric=X5R, Max Operating Temperature=85°C, Min Operating Temperature=-55°C, Package Quantity=4000, Tolerance=20%, Voltage=6.3V, Case/Package=0603, Depth=0.8mm, Height=0.8mm, Lead Free="Lead Free", Length=1.6mm, Material=Ceramic, Mount="Surface Mount", Packaging="Tape and Reel", Radiation Hardening=No, REACH SVHC="No SVHC", Termination=SMD/SMT, Thickness=0.035inch, Voltage Rating=6.3V, Voltage Rating (DC)=6.3V, Width=0.031inch
C3.A C3.B C3.C C5.A C5.B C5.C C5.D C8.A C8.B C8.C C8.D C9.A C9.B C9.C C9.D: library part CMP-2006-04390-1, Manufacturer="AVX Interconnect / Elco", Part Number=06035C104KAT4A
D1.A D1.B D1.C D1.D D2.A D2.B D2.C D2.D D3.A D3.B D3.C D3.D D4.A D4.B D4.C D4.D: library part CMP-1055-00493-2, "DIODE SCHOTTKY 30V 70MA SOD923", Capacitance=2pF, Forward Current=70mA, Manufacturer="On Semiconductor", Max Junction Temp=+125°C, Max Repetitive Reverse Voltage=40V, Max Surge Forward Current=500mA, Package=514AB-01, Peak Reverse Current=0.3uA, Reverse Voltage=30V, Temperature="-55°C to +125°C", Temperature Range Low=-55°C, Automotive=No, Category=Diode, Ciiva Ids=19354163, ComponentLink2Description=Datasheet, ComponentLink2URL=http://www.onsemi.cn/pub_link/Collateral/NSR0140P2-D.PDF, Device Class L1="Discrete Semiconductors", Device Class L2=Diodes, Device Class L3="Schottky Diodes", Digikey Description="DIODE SCHOTTKY 30V 70MA SOD923", Height=0.4mm, Import Ts=1521866362, Lead Free=Yes, Manufacturer Part Number=NSR0140P2T5G, Mouser Description="Schottky Diodes & Rectifiers SCHOTTKY DIODE", Octopart=https://octopart.com/nsr0140p2t5g-on+semiconductor-7506148, Release Date=1407123163, RoHS=TRUE, Temperature Range High=+125°C
J1 J2: library part CMP-73906-000010-1, "CONN DBL BANANA JACK TURRET", Color=Red, Current Rating=15A, Package Quantity=5, Voltage Rating=2.5kV, Voltage Rating (DC)=70V, Body Material=PC, Contact Material=Brass, Contact Plating=Tin, Depth=16mm, Gender=Female, Height=0.375inch, Housing Color=Red, Housing Material=Polycarbonate, Insulation="Mating End Insulated", Insulation Material=Polycarbonate, Lead Free="Lead Free", Length=24inch, Max Current Rating=15A, Mount=Panel, Number of Contacts=2, Number of Ports=2, Orientation=Straight, Packaging=Bulk, REACH SVHC="No SVHC", RoHS Compliant=Yes, Termination=Solder, Weight=0.033lb, Width=4inch
J3.A J3.B J3.C: library part CMP-2000-05487-1, "SMA Right-Angle PCB Jack Receptacle, Brass Body, Gold Plated, 50 Ohm, 5-Pin THD, RoHS, Tray", Manufacturer=Molex, Package Description="5-Pin Through Hole Device, Body 14.8 x 6.35 mm, Pitch 2.54 mm", Datasheet URL=http://www.molex.com/webdocs/datasheets/pdf/en-us/0731000114_RF_COAX_CONNECTORS.pdf, Datasheet Version=09/2016, Manufacturer URL=http://www.molex.com/, Mounting Technology=ThroughHole, Package Reference=731000114, Package URL=http://www.molex.com/pdm_docs/sd/731000114_sd.pdf
J4.A J4.B J4.C J4.D: library part CMP-002-00071-4, "Conn Barrier Strip 4 POS 9.53mm Solder ST Thru-Hole 20A/Contact"
K1.A K1.B K1.C K1.D K2.A K2.B K2.C K2.D: library part CMP-03195-000015-1, "RELAY GEN PURPOSE DPDT 2A 3VDC", Coil Current=46.7mA, Coil Power=140mW, Coil Resistance=64.3R, Coil Voltage (DC)=3V, Contact Current Rating=2A, Max Operating Temperature=85°C, Max Voltage Rating (AC)=250V, Max Voltage Rating (DC)=220V, Min Operating Temperature=-40°C, Package Quantity=35, Coil Type="Latching, Dual Coil", Contact Material=Gold, Current Rating=2A, Depth=7.5mm, Height=9.4mm, Length=15mm, Max Current Rating=2A, Mount="Through Hole", Number of Pins=10, Number of Poles=1, Operate Time=2ms, Packaging=Rail/Tube, Power Consumption=140mW, Radiation Hardening=No, Relay Type="General Purpose", Release Time=1ms, RoHS Compliant=Yes, Termination="PC Pin", Throw Configuration=DPDT
L1.A L1.B L1.C L1.D L2.A L2.B L2.C L2.D L3.A L3.B L3.C L3.D L4.A L4.B L4.C L4.D: library part CMP-006-00021-1
LED1: library part CMP-53976-000002-1, "LED RED DIFFUSED 1206 SMD", Colour=Red, Forward Current=20mA, Forward Voltage=2V, Manufacturer=VCC, Package=CMD15-21, Power Dissipation=105mW, Reverse Voltage=5V, Temperature="-40°C to +85°C", Temperature Range High=+85°C, Temperature Range Low=-40°C, Automotive=No, Category=Diode, ComponentLink2Description=Datasheet, ComponentLink2URL=https://www.vcclite.com/wp-content/uploads/wpallimport/files/files/CMD1521SeriesRev1.pdf, Device Class L1=Optoelectronics, Device Class L2=LEDs, Device Class L3=unset, Digikey Description="LED RED DIFFUSED 1206 SMD", Height=1.3mm, Lead Free=Yes, Led Orientation="Top View", Luminous Intensity=4mcd, Manufacturer Part Number=CMD15-21VRD/TR8, Mouser Description="Standard LEDs - SMD RED DIFFUSED", Octopart=https://octopart.com/cmd15-21vrd%2Ftr8-vcc-26668835, Peak Emmision Wavelength=640nm, RoHS=TRUE
P1 P2 P3: library part CMP-1502-01062-1, "THT Vertical Pin Header WR-PHD, Pitch 2.54 mm, Single Row, 3 pins", Contact Resistance=20mOhm, Manufacturer="Wurth Elektronik", Operating Temperature=-40to105degC, Rated Current=3A, Withstanding Voltage=500VAC, Working Voltage=250VAC, Datasheet URL=https://katalog.we-online.de/em/datasheet/6130xx11121.pdf, Gender=Male, Manufacturer URL=http://www.we-online.de, Mounting Technology=THT, Orientation=Vertical, Package Reference=61300311121, Packaging=Bag, Part Number=61300311121, Pin Number=3, Pitch=2.54mm, Publisher=WurthElektronik, Row Number=Single
R1: library part CMP-2000-00873-2, "RES SMD 1K OHM 0.1% 1/10W 0603", Case Code (Imperial)=0603, Case Code (Metric)=1608, Max Operating Temperature=155°C, Max Power Dissipation=100mW, Min Operating Temperature=-55°C, Package Quantity=5000, Resistance=1kR, Resistance Tolerance=0.1%, Resistor Type="Thin Film", Temperature Coefficient=25ppm/°C, Voltage Rating=75V, Case/Package=0603, Construction=Rectangular, Contact Plating=Tin, Depth=0.8mm, Height=0.45mm, Length=1.6mm, Military Standard=Not, Mount="Surface Mount", Number of Pins=2, Number of Terminations=2, Packaging="Tape and Reel", Power Rating=100mW, Radiation Hardening=No, REACH SVHC="No SVHC", RoHS Compliant=Yes, Series=ERA-3A, Size Code=0603, Technology="METAL FILM", Termination=SMD/SMT, Tolerance=0.1%, Width=0.8mm
R2: library part CMP-2000-00071-2, "RES SMD 470 OHM 0.1% 1/10W 0603", Case Code (Imperial)=0603, Case Code (Metric)=1608, Max Operating Temperature=155°C, Max Power Dissipation=100mW, Min Operating Temperature=-55°C, Package Quantity=1, Resistance=470R, Resistance Tolerance=0.1%, Resistor Type="Thin Film", Temperature Coefficient=25ppm/°C, Voltage Rating=75V, Case/Package=0603, Construction=Rectangular, Contact Plating=Tin, Depth=0.8mm, Features="Automotive AEC-Q200", Height=0.45mm, Lead Free="Lead Free", Length=1.6mm, Military Standard=Not, Mount="Surface Mount", Number of Pins=2, Number of Terminations=2, Packaging="Tape and Reel", Power Rating=100mW, Radiation Hardening=No, REACH SVHC="No SVHC", RoHS Compliant=Yes, Series=ERA-3A, Size Code=0603, Technology="THIN FILM", Termination=SMD/SMT, Tolerance=0.1%, Voltage Rating (DC)=75V, Width=0.8mm
R3.A R3.B R3.C: library part CMP-009-00027-5, "Chip Resistor, 22 Ohm, +/- 1%, 100 mW, -55 to 155 degC, 0603 (1608 Metric)", Case/Package=0603, Max Operating Temperature=155°C, Min Operating Temperature=-55°C, Power=100mW, Tolerance=1%, Voltage Rating=75V, Mounting Technology=SM, Pins=2, RoHS Compliant=True
R4.A R4.B R4.C R4.D: library part CMP-1012-00586-3, "Precision Thick Film Chip Resistor, 4.7 KOhm, +/- 1%, -55 to 155 degC, 0603 (1608 Metric), RoHS, Tape and Reel", Case Code (Imperial)=1206, Case Code (Metric)=3216, Case\Package=1205, Max Operating Temperature="125 degC", Min Operating Temperature="-55 degC", Package Quantity=1, Power Rating="250 mW", Resistance="220 Ohm", Tolerance=5%, Type (Resistor)="Thick Film", Voltage Rating="50 V", ComponentLink1Description="Manufacturer URL", ComponentLink1URL=http://www.panasonic.com/, ComponentLink2Description=Datasheet, ComponentLink2URL=http://industrial.panasonic.com/cdbs/www-data/pdf/RDA0000/AOA0000C86.pdf, DatasheetVersion=Apr-15, Elements=4, Height="0.024 inch", Length="0.126 inch", Mount="Surface Mount", PackageDescription="2-Pin Surface Mount Device, Body 1.6 x 0.85 mm", PackageReference=0603, Packaging="Tape and Reel", Pins=8, Radiation Hardening=No, REACH SVHC="No SVHC", RoHSCompliant=true, Width="0.063 inch"
R5.A R5.B R5.C R5.D R6.A R6.B R6.C R6.D: library part CMP-009-00178-1, "Res Thick Film NET 2M Ohm 1% 1W ±100ppm/C ISOL Conformal Coated 8-Pin SIP Pin Thru-Hole Bulk"
SW1: library part CMP-011-00006-2, "Slide Switch, SPDT, 500 V, -20 to 70 degC, 3-Pin THD, RoHS, Bulk", Contact Current Rating=200mA, Manufacturer=E-Switch, Max Operating Temperature=70°C, Min Operating Temperature=-20°C, Operating Force=250gf, Package Description="3-Pin Through Hole Device, Body 11.6 x 4 mm, Pitch 2.5 mm", Package Quantity=1000, Voltage Rating (AC)=30V, Case/Package=EG1218, Contact Finish=Silver, Contact Material=Copper, Contact Plating=Silver, Current Rating=200mA, Datasheet URL=https://www.e-switch.com/system/asset/product_line/data_sheet/119/EG.pdf, Datasheet Version=Oct-15, Manufacturer URL=http://www.e-switch.ch/en/, Mounting Technology=TH, Package Reference=EG1218, Packaging=Bulk, Pins=3, RoHS Compliant=True, Throw Configuration=SPDT, Voltage Rating (DC)=30V
TP1.A TP1.B TP1.C: library part CMP-002-00037-2, "Test Point, Orange, Height 4.6 mm, Tail Length 3 mm, 1-Pin THD, RoHS", Colour=Orange, Manufacturer=Keystone, Package Description="1-Pin Through Hole Device, Dia 2.54 mm", Package Quantity=10, Case/Package=5003, Connector Type=TestPoint, Contact Material=Bronze, Contact Plating=Tin, Datasheet URL=http://keyelco.com/userAssets/file/M65p56.pdf, Datasheet Version=Jun-15, Diameter=2.54mm, Manufacturer URL=http://www.keyelco.com/, Mounting Technology=TH, Package Reference=5003, Packaging=Bulk, Pins=1, RoHS Compliant=True
U1.A U1.B U1.C: library part CMP-04896-000141-1, "LOW-POWER COMPARATOR WITH REFERE"
U2.A U2.B U2.C U2.D: library part CMP-0859-00187-4, "IC INVERTER 2CH 2-INP SOT23-6", Case/Package=SOT-23, High Level Output Current=32mA, Max Operating Temperature=125°C, Max Supply Voltage=5.5V, Min Operating Temperature=-40°C, Min Supply Voltage=1.65V, Nominal Supply Current=40mA, Package Quantity=3000, Quiescent Current=10uA, Contact Plating=Gold, Height=1.15mm, Lead Free="Lead Free", Length=2.9mm, Logic Function=Buffer, Low Level Output Current=32mA, Mount="Surface Mount", Number of Bits=2, Number of Channels=2, Number Of Circuits=2, Number of Elements=2, Number of Gates=2, Number of Input Lines=2, Number of Inputs=1, Number of Output Lines=2, Number of Outputs=2, Number of Pins=6, Packaging="Tape and Reel", Polarity=Inverting, Propagation Delay=2.9ns, Radiation Hardening=No, REACH SVHC="No SVHC", RoHS Compliant=Yes, Turn-On Delay Time=7.2ns, Width=1.6mm
U3.A U3.B U3.C U3.D U4.A U4.B U4.C U4.D: library part CMP-013-00035-1, "Transistor MOSFET Array Dual N-CH 20V 540mA 6-Pin SOT-26 T/R"
U5.A U5.B U5.C U5.D U6.A U6.B U6.C U6.D: library part CMP-011-00013-2, "0.9-Ω on-state resistance, 5-V, 2: 1 (SPDT), 2-channel analog switch 10-VSSOP -40 to 85"

## Free pads (board coordinates)
  round 60 hole 118.11: 2(140,145) 2(140,7725) 2(4960,145)
  round 60 hole 118.11 mask+1.97: 2(4960,7725)

## Via types
v1: diameter 24, hole 12, Top Layer to Bottom Layer, tented both sides, 288 vias

## Nets (pads, with @x,y where several pads share a name; then routed paths per layer and width w, separated by ;. In a path a pad name is that pad's centre, name@x,y a point inside that pad or via, vN(x,y) a via of type N, cw(c..) or ccw(c..) an arc to the next point about the centre after c; other vN are vias at no path point)
+3V: C2.A.1 C2.B.1 C2.C.1 C3.A.2 C3.B.2 C3.C.2 C4.A.1 C4.B.1 C4.C.1 C4.D.1 C5.A.2 C5.B.2 C5.C.2 C5.D.2 C6.A.1 C6.B.1 C6.C.1 C6.D.1 C7.A.1 C7.B.1 C7.C.1 C7.D.1 C9.A.1 C9.B.1 C9.C.1 C9.D.1 D1.A.1 D1.B.1 D1.C.1 D1.D.1 D3.A.1 D3.B.1 D3.C.1 D3.D.1 J1.1 K1.A.1 K1.A.6 K1.B.1 K1.B.6 K1.C.1 K1.C.6 K1.D.1 K1.D.6 K2.A.1 K2.A.6 K2.B.1 K2.B.6 K2.C.1 K2.C.6 K2.D.1 K2.D.6 P3.1 R4.A.2 R4.B.2 R4.C.2 R4.D.2 R5.A.1 R5.A.5 R5.B.1 R5.B.5 R5.C.1 R5.C.5 R5.D.1 R5.D.5 R6.A.1 R6.A.5 R6.B.1 R6.B.5 R6.C.1 R6.C.5 R6.D.1 R6.D.5 SW1.3 U1.A.1 U1.B.1 U1.C.1 U2.A.5 U2.B.5 U2.C.5 U2.D.5 U6.A.8 U6.B.8 U6.C.8 U6.D.8 | length 2263.9
  Top Layer w10: 2745,6710 2750,6715 ; 2760,7235 2765,7230 ; 2760,7635 2765,7630 ; 2763.82,5711.18 2765,5710 ; 2765,6310 2770,6315 ; D3.D.1@2905,955 v1(2950,955) ; D3.B.1@2907.72,4800 v1(2945,4800) ; D1.A.1@2910,7670 v1(2970,7670) ; D3.C.1@2912.72,2875 v1(2955,2875) ; D3.A.1@2917.72,6725 v1(2955,6725) ; D1.B.1@2925,5750 v1(2980,5750) ; D1.C.1@2932.72,3820 v1(2990,3820) ; D1.D.1@2935,1900 v1(2990,1900) ; U6.D.8@3054.17,1184.37 3109.37,1184.37 3110,1185 ; U6.C.8@3059.17,3104.37 3127.09,3104.37 ; U6.B.8@3059.8,5030.63 3127.72,5030.63 ; U6.A.8@3059.8,6954.37 3127.72,6954.37 ; 3132.98,1070 3141.77,1078.79 ; 3734.48,7600 U2.A.5@3789.71,7600 ; 3750.1,5672.6 U2.B.5@3805.32,5672.6 ; 3754.48,1825 U2.D.5@3809.71,1825 ; 3754.48,3745 U2.C.5@3809.71,3745
  Top Layer w40: R6.C.5@2672.61,2457.57 2758.04,2457.57 ; R5.D.5@2677.61,1462.57 2763.04,1462.57 ; R6.A.5@2677.64,6310 2765,6310 ; R6.A.1@2677.64,6710 2745,6710 ; R5.A.5@2677.64,7235 2681.46,7231.17 2695.61,7231.17 2696.78,7230 2765,7230 ; R5.A.1@2677.64,7635 2760,7635 ; R5.B.1@2678.39,5711.18 2763.82,5711.18 ; R6.D.1@2682.61,942.57 v1(2768.04,942.57) ; R5.D.1@2682.61,1862.57 v1@2768.04,1862.57 ; R6.C.1@2682.61,2862.57 v1(2768.04,2862.57) ; R5.C.5@2682.61,3382.57 2768.04,3382.57 ; R6.B.5@2682.61,4382.57 2768.04,4382.57 ; R6.D.5@2687.61,537.57 2773.04,537.57 ; R5.C.1@2687.61,3782.57 v1(2773.04,3782.57) ; R6.B.1@2687.61,4787.57 2773.04,4787.57 ; R5.B.5@2687.61,5307.57 2773.04,5307.57
  other v1: 2770,375 2770,450 2770,590 2770,770 2770,850 3135,1050 3165,1080 3133.23,1105.31 3165,1135 3135,1160 3170,1180 3135,1205 2780,1320 2780,1385 2775,1515 2775,1690 2775,1785 3525,1805 3590,1805 3655,1805 3555,1855 3625,1855 3690,1855 2775,1865 3520,1900 3590,1900 3655,1900 3555,1940 3625,1940 3520,1980 3590,1980 2770,2285 2770,2360 2770,2510 2770,2695 2770,2780 3164.37,2995 3164.37,3040 3124.37,3070 3164.37,3095 3124.37,3125 2770,3240 2770,3310 2770,3435 2775,3620 2775,3700 3525,3725 3590,3725 3655,3725 3555,3775 3625,3775 3690,3775 3520,3820 3590,3820 3655,3820 3555,3860 3625,3860 3520,3900 3590,3900 2775,4225 2770,4290 2770,4440 2770,4605 2770,4685 2770,4770 3165,4936.26 3165,4981.26 3125,5011.26 3165,5031.26 3125,5056.26 2770,5210 2770,5355 2770,5530 2770,5615 3520.61,5652.6 3585.61,5652.6 3650.61,5652.6 2770,5695 3550.61,5702.6 3620.61,5702.6 3685.61,5702.6 3515.61,5747.6 3585.61,5747.6 3650.61,5747.6 3550.61,5787.6 3620.61,5787.6 3515.61,5827.6 3585.61,5827.6 4215,6072.56 4270,6072.56 4325,6072.56 4375,6072.56 4425,6072.56 2770,6215 2770,6365 2770,6515 2770,6610 2770,6700 4215,6720 4270,6720 4325,6720 4375,6720 4425,6720 3165,6860.63 3165,6915.63 3125,6940.63 3165,6960.63 3125,6985.63 2775,7105 2775,7295 4215,7365 4270,7365 4325,7365 4375,7365 4425,7365 2775,7475 2775,7540 3505,7580 3570,7580 3635,7580 2775,7605 3535,7630 3605,7630 3670,7630 3500,7675 3570,7675 3635,7675 3535,7715 3605,7715 3500,7755 3570,7755
"\E\N\_out_Signal Processing1": R4.A.1 U2.A.6 U3.A.2 U4.A.2 | length 2492.7
  Top Layer w10: R4.A.1@3375.39,7657.74 3347.74,7657.74 3290,7600 3290,7533.79 3298.79,7525 3495,7525 ; U4.A.2@3574.33,6355 3510,6355 3500,6365 3500,6420 3515,6435 3735,6435 3750,6450 3750,7176.21 3741.21,7185 3503.79,7185 3495,7193.79 3495,7284.41 ; U3.A.2@3577.64,7284.41 3495,7284.41 ; U2.A.6@3789.71,7562.6 3722.6,7562.6 3685,7525 3495,7525 ; 3495,7284.41 3495,7525
"\E\N\_out_Signal Processing2": R4.B.1 U2.B.6 U3.B.2 U4.B.2 | length 3212.7
  Top Layer w10: R4.B.1@3391.01,5730.33 3363.35,5730.33 3305.61,5672.6 3305.61,5606.39 3314.4,5597.6 3495.75,5597.6 3510.61,5597.6 3700.61,5597.6 3738.21,5635.2 U2.B.6@3805.32,5635.2 ; 3495.75,5595 3495.75,5360.59 ; U4.B.2@3575.08,4431.18 3510.75,4431.18 3500.75,4441.18 3500.75,4496.18 3515.75,4511.18 3735.75,4511.18 3750.75,4526.18 ; U3.B.2@3578.39,5360.59 3495.75,5360.59 ; 3495.75,5360.59 3495.75,5269.97 3504.53,5261.18 3741.96,5261.18 3750.75,5252.39 ; 3750.75,4526.18 3750.75,5252.39 ; 3750.75,4526.18 3750.75,5252.39
"\E\N\_out_Signal Processing3": R4.C.1 U2.C.6 U3.C.2 U4.C.2 | length 3212.8
  Top Layer w10: R4.C.1@3395.39,3802.74 3367.74,3802.74 3310,3745 3310,3683.79 3318.79,3675 3710,3675 3742.6,3707.6 U2.C.6@3809.71,3707.6 ; 3494.72,3676.01 3494.72,3434.41 ; U4.C.2@3574.06,2505 3509.72,2505 3499.72,2515 3499.72,2570 3514.72,2585 3734.72,2585 3749.72,2600 ; U3.C.2@3577.36,3434.41 3494.72,3434.41 ; 3494.72,3434.41 3494.72,3343.79 3503.51,3335 3740.94,3335 3749.72,3326.21 ; 3749.72,2600 3749.72,3326.21 ; 3749.72,2600 3749.72,3326.21
"\E\N\_out_Signal Processing4": R4.D.1 U2.D.6 U3.D.2 U4.D.2 | length 3213.9
  Top Layer w10: R4.D.1@3395.39,1882.74 3367.74,1882.74 3310,1825 3310,1758.79 3318.79,1750 3515,1750 3705,1750 3742.6,1787.6 U2.D.6@3809.71,1787.6 ; 3494.72,1750 3494.72,1514.41 ; U4.D.2@3574.06,585 3509.72,585 3499.72,595 3499.72,650 3514.72,665 3734.72,665 3749.72,680 ; U3.D.2@3577.36,1514.41 3494.72,1514.41 ; 3494.72,1514.41 3494.72,1423.79 3503.51,1415 3740.94,1415 3749.72,1406.21 ; 3749.72,680 3749.72,1406.21 ; 3749.72,680 3749.72,1406.21
"COM_OUT_Linear Data 1": R3.A.1 U1.A.5 | length 327.8
  Top Layer w10: R3.A.1@4490,7435 4590,7435 4620,7405 4620,7315.7 4614.14,7309.84 U1.A.5@4526.36,7309.84
"COM_OUT_Linear Data 2": R3.B.1 U1.B.5 | length 327.8
  Top Layer w10: R3.B.1@4490,6790 4590,6790 4620,6760 4620,6670.7 4614.14,6664.84 U1.B.5@4526.36,6664.84
"COM_OUT_Van Atta Data": R3.C.1 U1.C.5 | length 327.8
  Top Layer w10: R3.C.1@4490,6142.56 4590,6142.56 4620,6112.56 4620,6023.26 4614.14,6017.4 U1.C.5@4526.36,6017.4
"EN_Input and Relays1": C1.1 R1.2 U2.A.1 U2.B.1 U2.C.1 U2.D.1 U3.A.5 U3.B.5 U3.C.5 U3.D.5 U4.A.5 U4.B.5 U4.C.5 U4.D.5 | length 11237.4
  Top Layer w10: U4.D.5@3671.5,585 4010,585 4040,615 4040,1515 4040,1790 ; U4.C.5@3671.5,2505 4040,2505 ; U4.A.5@3671.77,6355 3845,6355 ; U4.B.5@3672.52,4431.18 3850,4431.18 ; U3.D.5@3674.8,1514.41 4040,1514.41 ; U3.C.5@3674.8,3434.41 4039.41,3434.41 4040,3435 ; U3.A.5@3675.08,7284.41 3844.41,7284.41 3845,7285 ; U3.B.5@3675.83,5360.59 4039.41,5360.59 4040,5360 ; U2.A.1@3880.29,7562.6 3966.21,7562.6 3975,7553.81 3975,7520 3935,7480 3875,7480 3845,7450 3845,7285 ; U2.B.1@3895.91,5635.2 4035.2,5635.2 4040,5640 ; U2.D.1@3900.29,1787.6 4037.6,1787.6 4040,1790 ; U2.C.1@3900.29,3707.6 4039.9,3707.6 4040,3707.5 ; v1(4232.56,1895) 4232.56,2162.56 4265,2195 4666.21,2195 4672.5,2188.71 4672.5,2132.5 ; C1.1@4612.5,2132.5 4672.5,2132.5 ; R1.2@4720.37,2135 4675,2135 4672.5,2132.5 ; 3845,6355 3845,7285 ; 3845,6355 3845,6115 4040,5920 4040,5640 ; 3850,4431.18 3850,4945 4040,5135 4040,5360 ; 3850,4431.18 3850,4170 4040,3980 4040,3707.5 ; 4040,1790 v1(4040,1895) 4040,1899.16 4040,2478 4040,2505 ; 4040,2505 4040,3435 ; 4040,3435 4040,3707.5 ; 4040,5360 4040,5640
  Bottom Layer w10: v1(4040,1895) v1(4232.56,1895)